# EAGLE board gnublin_ext_ssd1963 (EAGLE 6.3)
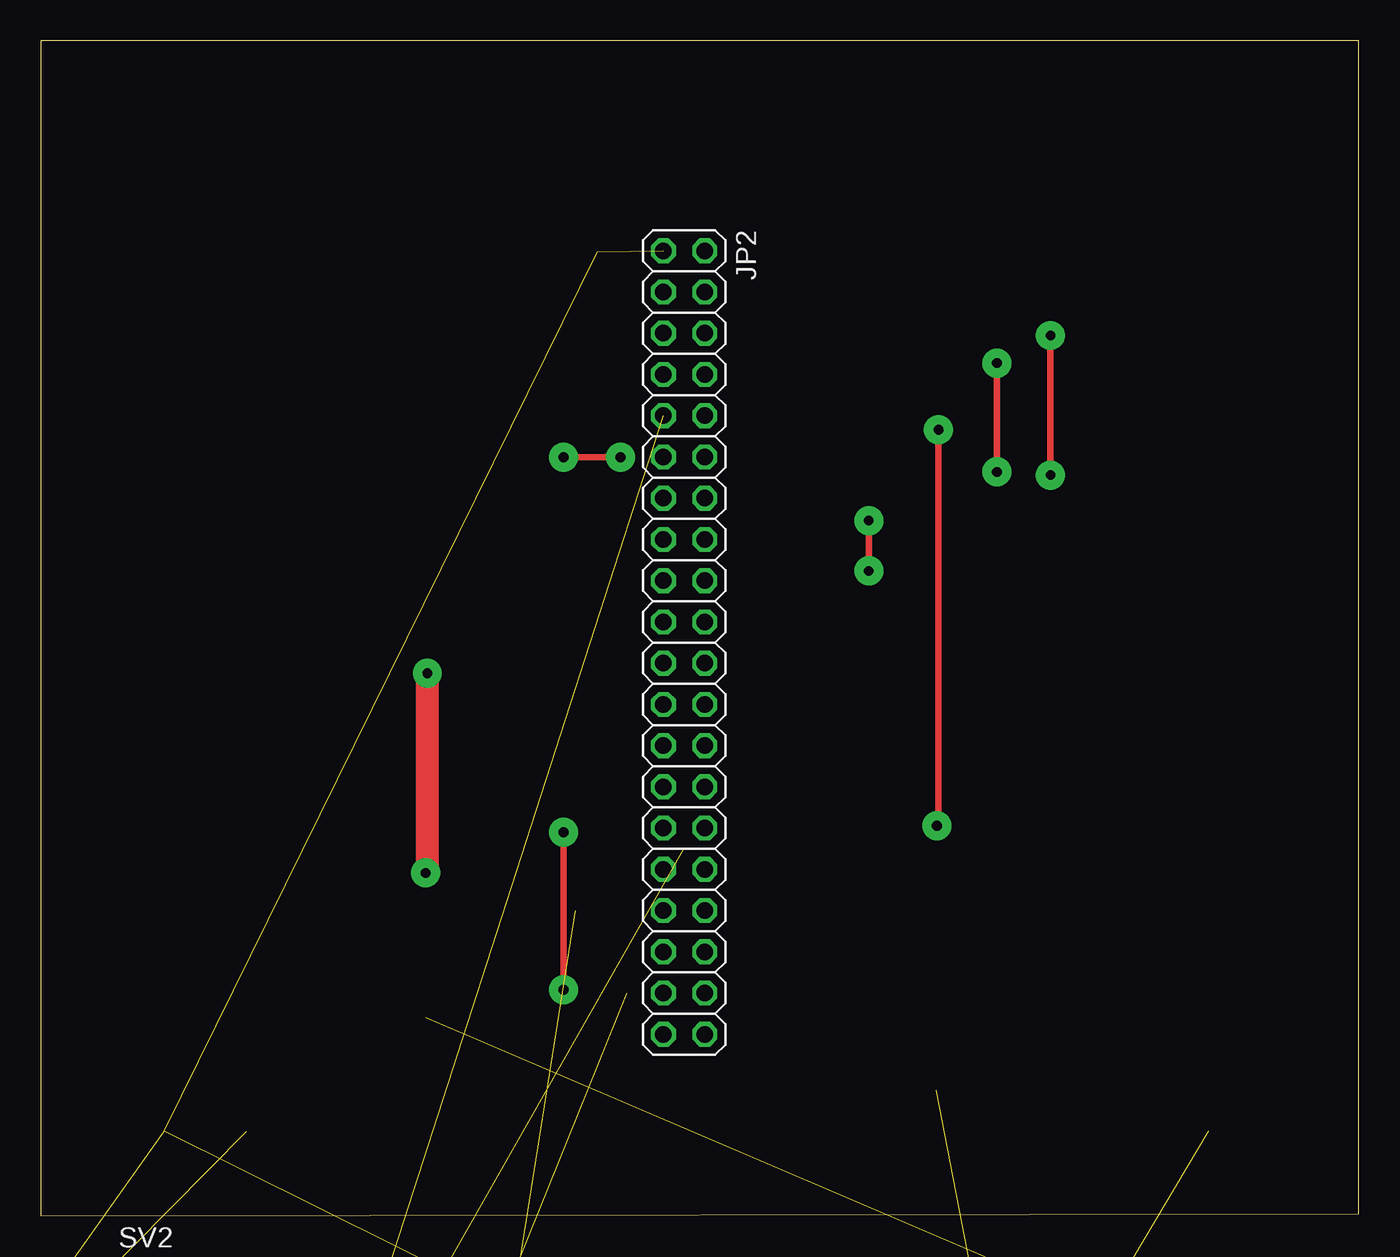
[diagram p0: board, top side]
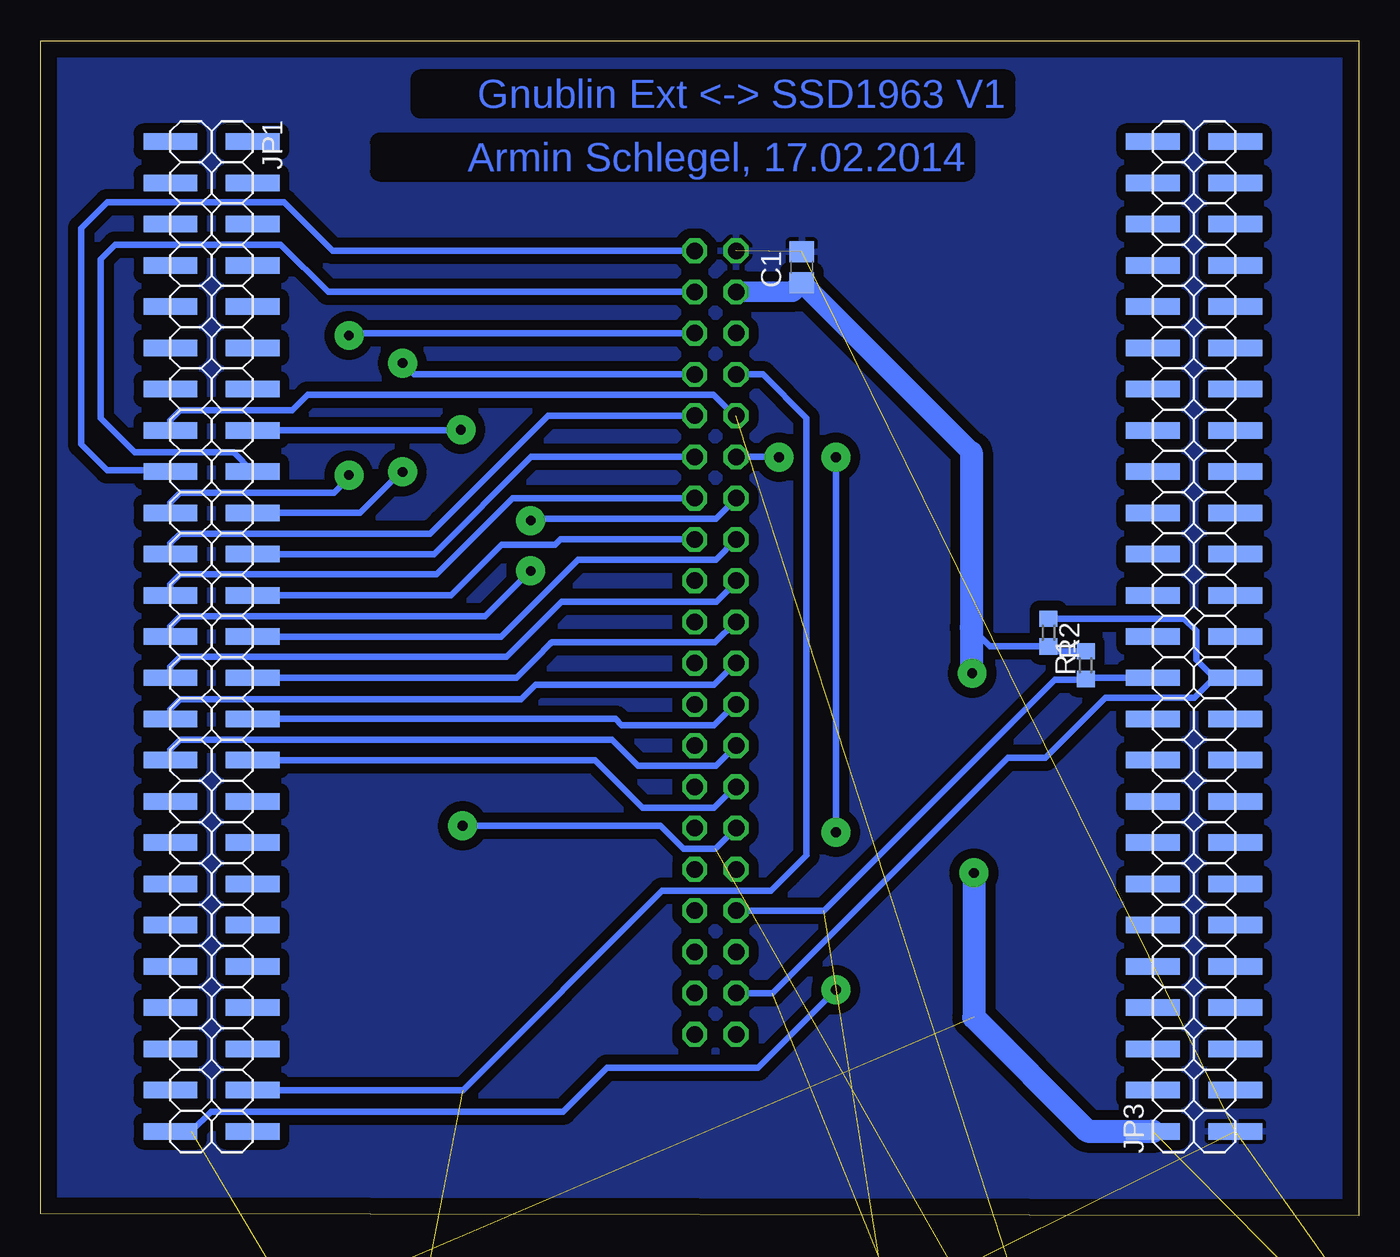
[diagram p1: board, bottom side, seen from below]

Size 81.23 x 72.39 mm. Coordinates in mm from the lower left corner, seen from the top.
Outline: 81.23,0.13 81.23,72.39 0,72.39 0,0 81.23,0.13
Copper layers (1*16): Top 0.035mm / dielectric 1.5mm / Bottom 0.035mm
Design rules "default": minimum track width 10mil, minimum drill 24mil, track to track 8mil, track to pad 8mil, pad to pad 8mil, via to via 8mil, smd to smd 8mil, copper to edge 40mil, drill to drill 8mil, minimum pad ring 10mil, minimum via ring 8mil, stop-mask expansion 4mil, vias tented up to drill 0mil, thermal gap 10mil
Net classes: 0 default: width 0.254 mm, drill 0.7 mm, clearance 0.254 mm

## Footprints (pad centres in the part's own frame; a part is rotated, then mirrored left to right if it is on the bottom)
C0805 = smd 1.3 x 1.5: 1 -0.95,0; 2 0.95,0
2X25SMD = smd 1.016 x 3.302: 1 -1.27,-3.81; 2 -1.27,1.27; 3 1.27,-3.81; 4 1.27,1.27; 5 3.81,-3.81; 6 3.81,1.27; 7 6.35,-3.81; 8 6.35,1.27; 9 8.89,-3.81; 10 8.89,1.27; 11 11.43,-3.81; 12 11.43,1.27; 13 13.97,-3.81; 14 13.97,1.27; 15 16.51,-3.81; 16 16.51,1.27; 17 19.05,-3.81; 18 19.05,1.27; 19 21.59,-3.81; 20 21.59,1.27; 21 24.13,-3.81; 22 24.13,1.27; 23 26.67,-3.81; 24 26.67,1.27; 25 29.21,-3.81; 26 29.21,1.27; 27 31.75,-3.81; 28 31.75,1.27; 29 34.29,-3.81; 30 34.29,1.27; 31 36.83,-3.81; 32 36.83,1.27; 33 39.37,-3.81; 34 39.37,1.27; 35 41.91,-3.81; 36 41.91,1.27; 37 44.45,-3.81; 38 44.45,1.27; 39 46.99,-3.81; 40 46.99,1.27; 41 49.53,-3.81; 42 49.53,1.27; 43 52.07,-3.81; 44 52.07,1.27; 45 54.61,-3.81; 46 54.61,1.27; 47 57.15,-3.81; 48 57.15,1.27; 49 59.69,-3.81; 50 59.69,1.27
2X20 = drill 1.016 octagon: 1 -24.13,-1.27; 2 -24.13,1.27; 3 -21.59,-1.27; 4 -21.59,1.27; 5 -19.05,-1.27; 6 -19.05,1.27; 7 -16.51,-1.27; 8 -16.51,1.27; 9 -13.97,-1.27; 10 -13.97,1.27; 11 -11.43,-1.27; 12 -11.43,1.27; 13 -8.89,-1.27; 14 -8.89,1.27; 15 -6.35,-1.27; 16 -6.35,1.27; 17 -3.81,-1.27; 18 -3.81,1.27; 19 -1.27,-1.27; 20 -1.27,1.27; 21 1.27,-1.27; 22 1.27,1.27; 23 3.81,-1.27; 24 3.81,1.27; 25 6.35,-1.27; 26 6.35,1.27; 27 8.89,-1.27; 28 8.89,1.27; 29 11.43,-1.27; 30 11.43,1.27; 31 13.97,-1.27; 32 13.97,1.27; 33 16.51,-1.27; 34 16.51,1.27; 35 19.05,-1.27; 36 19.05,1.27; 37 21.59,-1.27; 38 21.59,1.27; 39 24.13,-1.27; 40 24.13,1.27
R0603 = smd 1 x 1.1: 1 -0.85,0; 2 0.85,0
FE25-2 = drill 0.914: 1 -30.48,1.27; 41 20.32,1.27 | drill 0.914 octagon: 2 -30.48,-1.27; 3 -27.94,1.27; 4 -27.94,-1.27; 5 -25.4,1.27; 6 -25.4,-1.27; 7 -22.86,1.27; 8 -22.86,-1.27; 9 -20.32,1.27; 10 -20.32,-1.27; 11 -17.78,1.27; 12 -17.78,-1.27; 13 -15.24,1.27; 14 -15.24,-1.27; 15 -12.7,1.27; 16 -12.7,-1.27; 17 -10.16,1.27; 18 -10.16,-1.27; 19 -7.62,1.27; 20 -7.62,-1.27; 21 -5.08,1.27; 22 -5.08,-1.27; 23 -2.54,1.27; 24 -2.54,-1.27; 25 0,1.27; 26 0,-1.27; 27 2.54,1.27; 28 2.54,-1.27; 29 5.08,1.27; 30 5.08,-1.27; 31 7.62,1.27; 32 7.62,-1.27; 33 10.16,1.27; 34 10.16,-1.27; 35 12.7,1.27; 36 12.7,-1.27; 37 15.24,1.27; 38 15.24,-1.27; 39 17.78,1.27; 40 17.78,-1.27; 42 20.32,-1.27; 43 22.86,1.27; 44 22.86,-1.27; 45 25.4,1.27; 46 25.4,-1.27; 47 27.94,1.27; 48 27.94,-1.27; 49 30.48,1.27; 50 30.48,-1.27

## Placement (x,y rotation side)
C1  100n  [C0805]  34.33,58.43 90 bottom
JP1  [2X25SMD]  69.43,64.9 270 bottom
JP2  [2X20]  39.65,35.32 270 top
JP3  [2X25SMD]  11.43,6.48 90 bottom
R1  10k  [R0603]  16.83,33.93 90 bottom
R2  10k  [R0603]  19.13,35.93 270 bottom
SV2  [FE25-2]  31.48,-5.37 0 top  (outside the outline)
SV4  [FE25-2]  31.48,-12.82 0 top  (outside the outline)

## Library data of the parts
C1 R1 R2 = rcl
JP1 JP3 = pinhead_smd
JP2 = pinhead
SV2 SV4 = con-lsta; OC_FARNELL: unknown; OC_NEWARK: unknown

## Nets
+3V3: C1.1 JP2.3 JP3.2 R1.2 R2.2 SV2.2 SV2.49 SV4.1 SV4.50
+5V: SV2.4 SV4.3
CTS_N: SV2.25
GND: C1.2 JP2.1 JP3.1 SV2.1 SV2.26 SV2.29 SV2.36 SV2.50 SV4.2
GPIO0: SV2.3
GPIO1: SV2.6
GPIO2: SV2.5
GPIO3: SV2.8
GPIO4: SV2.7
GPIO11: SV2.16
GPIO12: SV2.15
GPIO13: SV2.18
GPIO14: SV2.17
GPIO15: SV2.20
GPIO16: SV2.19
GPIO17: SV2.22
GPIO18: SV2.21
GPIO19: JP2.33 JP3.24 R1.1 SV2.24
GPIO20: JP2.37 JP3.23 R2.1 SV2.23
I2C_SCL0: SV2.32
I2C_SCL1: SV2.31
I2C_SDA0: SV2.34
I2C_SDA1: SV2.33
I2SRX_BCK0: SV2.43
I2SRX_BCK1: SV2.44
I2SRX_D0: SV2.47
I2SRX_D1: SV2.48
I2SRX_WS0: SV2.45
I2SRX_WS1: SV2.46
I2STX_BCK0: SV2.37
I2STX_BCK1: SV2.38
I2STX_CLK0: SV2.35
I2STX_D0: SV2.41
I2STX_D1: SV2.42
I2STX_WS0: SV2.39
I2STX_WS1: SV2.40
LPC_A0: SV4.33
LPC_A1: SV4.34
LPC_A2: SV4.35
LPC_A3: SV4.36
LPC_A4: SV4.37
LPC_A5: SV4.38
LPC_A6: SV4.39
LPC_A7: SV4.40
LPC_A8: SV4.41
LPC_A9: SV4.42
LPC_A10: SV4.43
LPC_A11: SV4.44
LPC_A12: SV4.45
LPC_A13: SV4.46
LPC_A14: SV4.47
LPC_A15: JP1.48 JP2.7 SV4.48
LPC_CKE: SV4.13
LPC_CS: SV4.14
LPC_D0: SV4.17
LPC_D1: SV4.18
LPC_D2: SV4.19
LPC_D3: SV4.20
LPC_D4: SV4.21
LPC_D5: SV4.22
LPC_D6: SV4.23
LPC_D7: SV4.24
LPC_D8: SV4.25
LPC_D9: SV4.26
LPC_D10: SV4.27
LPC_D11: SV4.28
LPC_D12: SV4.29
LPC_D13: SV4.30
LPC_D14: SV4.31
LPC_D15: SV4.32
LPC_DB0: JP1.17 JP2.2
LPC_DB1: JP1.18 JP2.4
LPC_DB2: JP1.19 JP2.6
LPC_DB3: JP1.20 JP2.8
LPC_DB4: JP1.21 JP2.10
LPC_DB5: JP1.22 JP2.12
LPC_DB6: JP1.23 JP2.14
LPC_DB7: JP1.24 JP2.16
LPC_DB8: JP1.25 JP2.13
LPC_DB9: JP1.26 JP2.15
LPC_DB10: JP1.27 JP2.17
LPC_DB11: JP1.28 JP2.19
LPC_DB12: JP1.29 JP2.21
LPC_DB13: JP1.30 JP2.23
LPC_DB14: JP1.31 JP2.25
LPC_DB15: JP1.32 JP2.27
LPC_DQM0: JP1.49 JP2.11 SV4.49
LPC_DQM1: SV4.12
LPC_MCI_CD: SV4.10
LPC_MCI_CLK: SV2.10
LPC_MCI_CMD: SV2.9
LPC_MCI_DAT0: SV2.12
LPC_MCI_DAT1: SV2.11
LPC_MCI_DAT2: SV2.14
LPC_MCI_DAT3: SV2.13
LPC_WE: JP1.15 JP2.9 SV4.15
NCS0: SV4.4
NCS1: SV4.5
NCS2: SV4.6
NCS3: SV4.7
RTS_N: SV2.28
RXD: SV2.30
RYBN0: SV4.8
RYBN1: SV4.9
RYBN3: SV4.11
STCS0: JP1.16 JP2.29 SV4.16
TXD: SV2.27

## Tracks (layer width: path | path; a pad name or v marks a point on that pad's centre or on a via)
+3V3  (via drill 0.6 pad 1.78)  (4 unrouted)
  Top 1.422: v23.83,33.43 23.83,21.23 v23.73,21.13
  Bottom 0.406: R1.2 18.83,34.78 R2.2 22.73,35.08 23.88,36.23
  Bottom 1.27: 23.88,47.03 C1.1 34.9,56.91 JP2.3
  Bottom 1.422: 23.88,47.03 23.88,36.23 23.88,33.48 v23.83,33.43 | v23.73,21.13 23.73,12.23 16.73,5.23 12.72,5.23 JP3.2
+5V  (1 unrouted)
GND  (8 unrouted)
  pour Bottom (isolate 0.61): 0.16,0 0.16,72.77 81.14,72.77 81.14,0
GPIO19  (1 unrouted)
  Bottom 0.406: JP2.33 32.95,18.81 18.73,33.03 16.88,33.03 R1.1 16.76,33.15 JP3.24
GPIO20  (1 unrouted)
  Bottom 0.406: JP3.23 8.91,33.15 | JP2.37 36.13,13.73 21.63,28.23 19.33,28.23 15.63,31.93 10.13,31.93 8.91,33.15 | 8.91,33.15 10.03,34.27 10.03,36.03 10.78,36.78 R2.1
LPC_A15  (1 unrouted)
  Bottom 0.406: JP1.48 55.21,7.75 42.93,20.03 36.23,20.03 35.28,20.98 35.13,21.13 34.03,22.23 34.03,49.13 36.73,51.83 JP2.7
LPC_DB0
  Bottom 0.406: JP2.2 63.25,59.45 66.23,62.43 77.13,62.43 78.73,60.83 78.73,47.53 77.13,45.93 73.32,45.93 JP1.17
LPC_DB1
  Bottom 0.406: JP2.4 63.51,56.91 66.43,59.83 76.63,59.83 77.53,58.93 77.53,49.13 75.43,47.03 69.34,47.03 JP1.18
LPC_DB2  (via drill 0.6 pad 1.78)
  Top 0.406: v62.23,54.23 v62.23,45.63
  Bottom 0.406: JP1.19 73.24,43.92 72.63,44.53 63.13,44.53 62.23,45.43 v62.23,45.63 | JP2.6 62.09,54.37 v62.23,54.23
LPC_DB3  (via drill 0.6 pad 1.78)
  Top 0.406: v58.93,52.53 v58.93,45.83
  Bottom 0.406: JP1.20 61.55,43.31 59.03,45.83 v58.93,45.83 | JP2.8 58.23,51.83 v58.93,52.53
LPC_DB4
  Bottom 0.406: JP1.21 73.24,41.42 72.63,42.03 57.23,42.03 57.03,42.23 56.53,42.73 49.97,49.29 JP2.10
LPC_DB5
  Bottom 0.406: JP2.12 51.01,46.75 56.99,40.77 JP1.22
LPC_DB6
  Bottom 0.406: JP1.23 73.24,38.92 72.63,39.53 56.83,39.53 52.15,44.21 JP2.14
LPC_DB7
  Bottom 0.406: JP1.24 55.93,38.23 52.83,41.33 49.53,41.33 49.19,41.67 JP2.16
LPC_DB8  (via drill 0.6 pad 1.78)
  Top 0.406: v51.03,39.73 v51.03,42.83
  Bottom 0.406: JP1.25 73.24,36.32 72.63,36.93 53.83,36.93 v51.03,39.73 | JP2.13 38.38,44.18 39.63,42.93 50.93,42.93 v51.03,42.83
LPC_DB9
  Bottom 0.406: JP1.26 52.87,35.69 48.13,40.43 39.63,40.43 JP2.15
LPC_DB10
  Bottom 0.406: JP1.27 73.24,33.82 72.63,34.43 52.53,34.43 49.13,37.83 39.58,37.83 38.38,39.03 JP2.17
LPC_DB11
  Bottom 0.406: JP2.19 38.42,36.58 39.68,35.33 49.73,35.33 49.83,35.23 50.7,34.35 51.91,33.15 JP1.28
LPC_DB12
  Bottom 0.406: JP1.29 73.24,31.22 72.63,31.83 51.63,31.83 50.73,32.73 39.73,32.73 38.41,34.05 JP2.21
LPC_DB13
  Bottom 0.406: JP2.23 38.45,31.51 39.73,30.23 45.43,30.23 45.81,30.61 JP1.30
LPC_DB14
  Bottom 0.406: JP1.31 73.24,28.72 72.63,29.33 46.03,29.33 44.43,27.73 39.63,27.73 JP2.25
LPC_DB15
  Bottom 0.406: JP2.27 38.43,26.43 39.73,25.13 44.13,25.13 47.07,28.07 JP1.32
LPC_DQM0  (via drill 0.6 pad 1.78)  (1 unrouted)
  Top 0.406: v32.23,13.93 v32.23,23.63 | v35.73,46.73 v32.23,46.73
  Bottom 0.406: JP1.49 71.95,5.21 70.73,6.43 49.03,6.43 46.33,9.13 37.03,9.13 v32.23,13.93 | JP2.11 35.75,46.75 v35.73,46.73 | v32.23,46.73 v32.23,23.63
LPC_WE  (1 unrouted)
  Bottom 0.406: JP1.15 73.24,49.02 72.63,49.63 65.73,49.63 64.78,50.58 39.78,50.58 38.49,49.29 JP2.9
STCS0  (via drill 0.6 pad 1.78)  (1 unrouted)
  Top 0.406: v55.33,48.43 55.33,24.13 v55.23,24.03
  Bottom 0.406: JP1.16 55.37,48.39 v55.33,48.43 | v55.23,24.03 43.03,24.03 41.63,22.63 39.63,22.63 JP2.29

## Text on the board
Bottom: Gnublin Ext <-> SSD1963 V1 | Armin Schlegel, 17.02.2014